# Altium PCB MICROPRESSURE.PcbDoc (part 1 of 2)
Units mm, origin at the board's own origin, x right, y up, seen from the top; angles counter-clockwise.
Board outline 57.02 x 83.19 mm, 2 copper layers (Top Layer, Bottom Layer); 104 components, 45 nets, 269 pads, 428 vias.
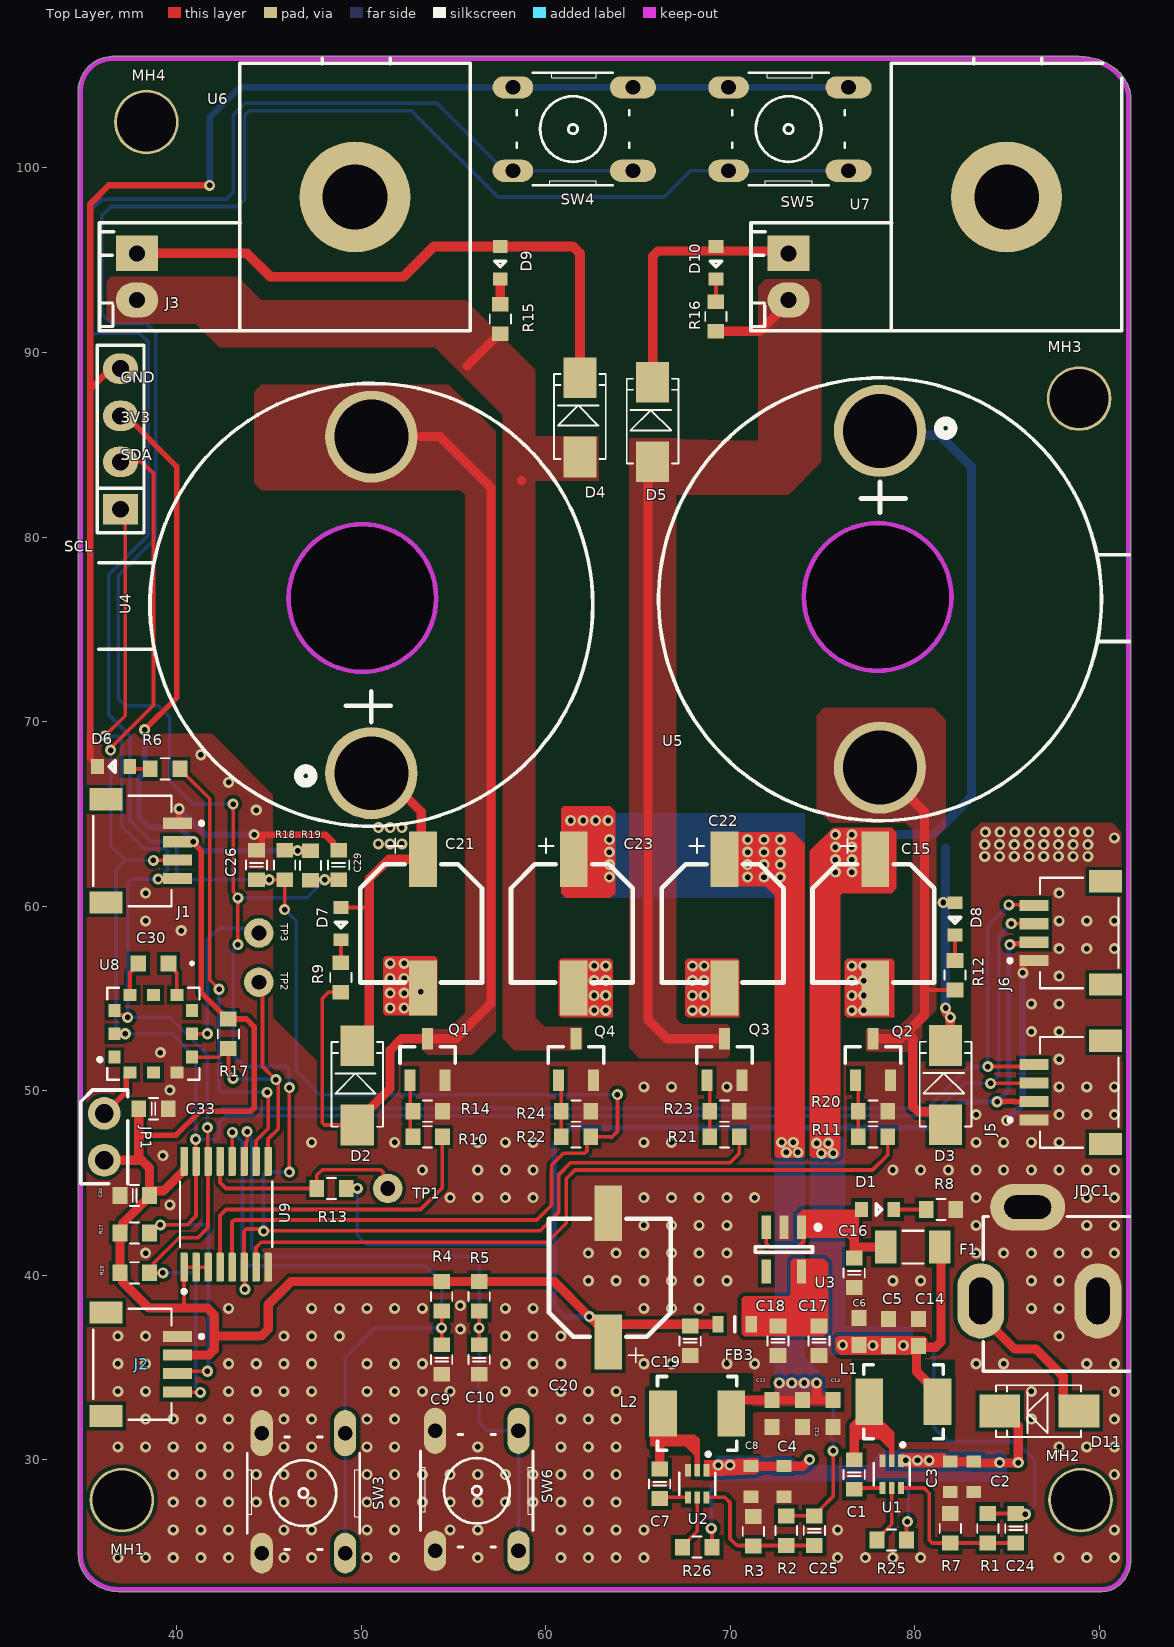
[diagram p0: Top Layer view]
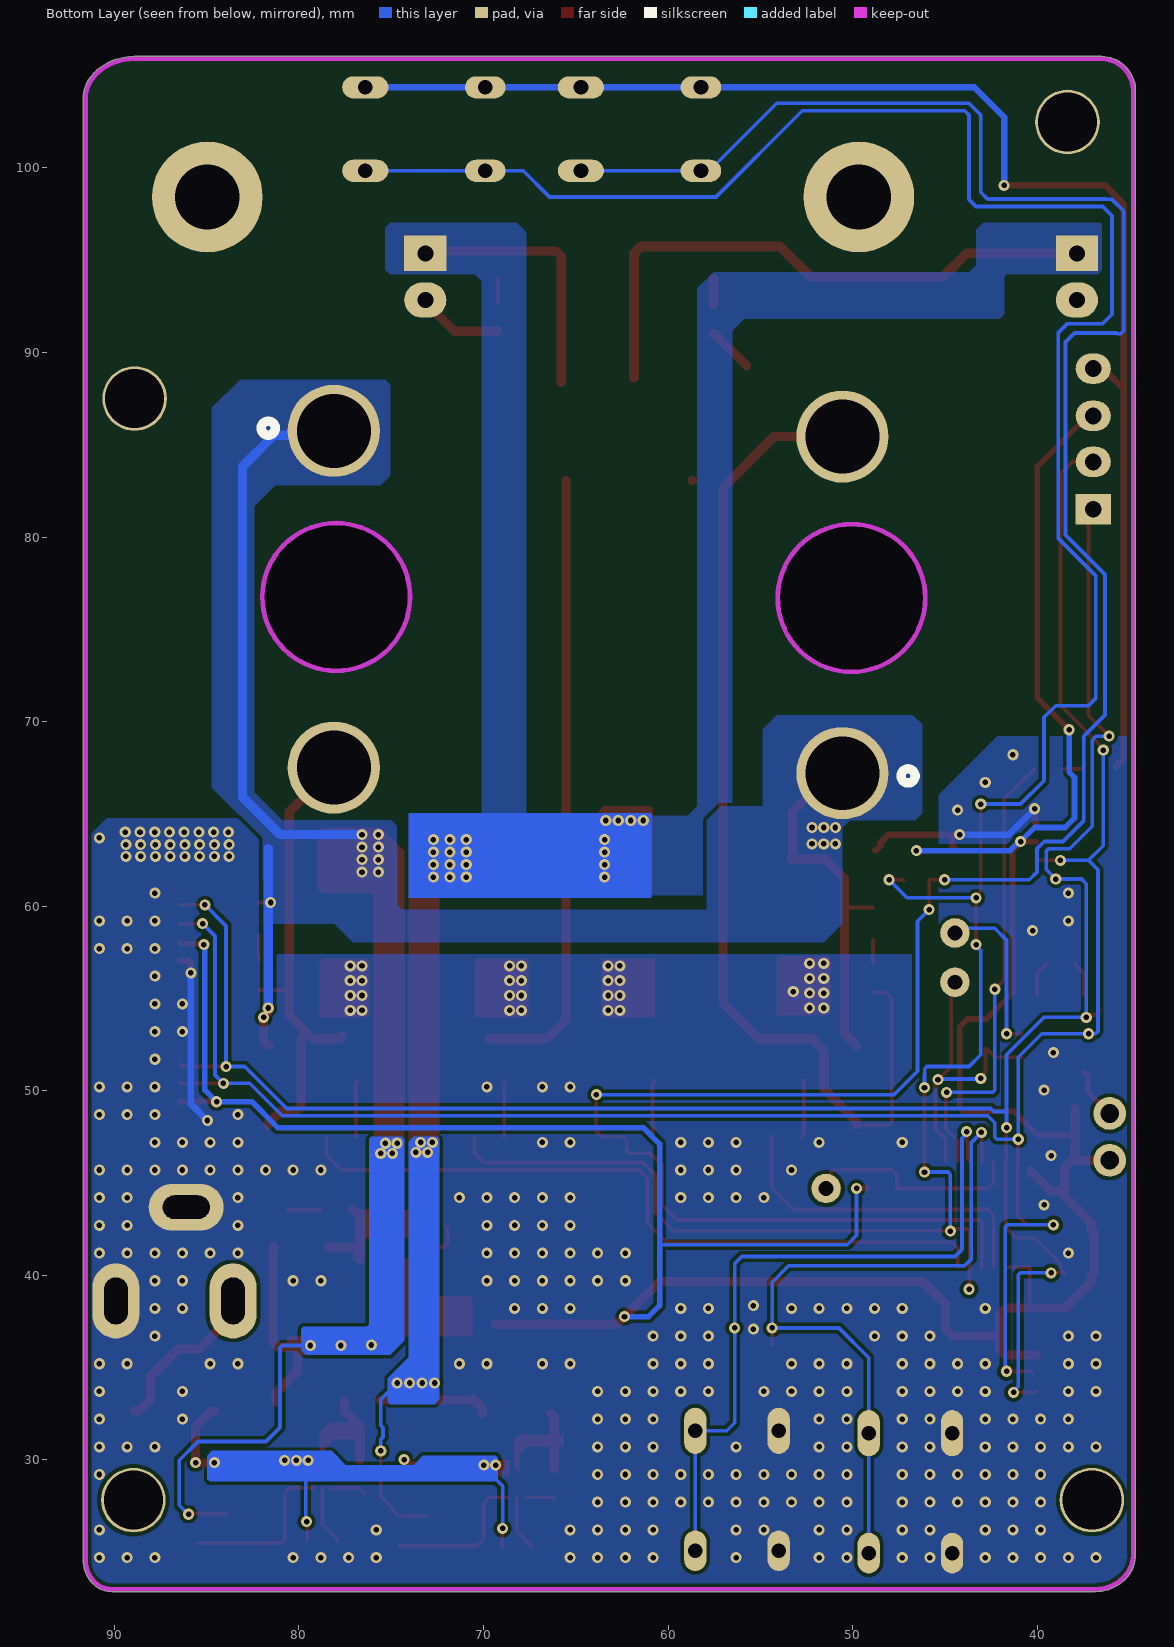
[diagram p1: Bottom Layer view, seen from below]
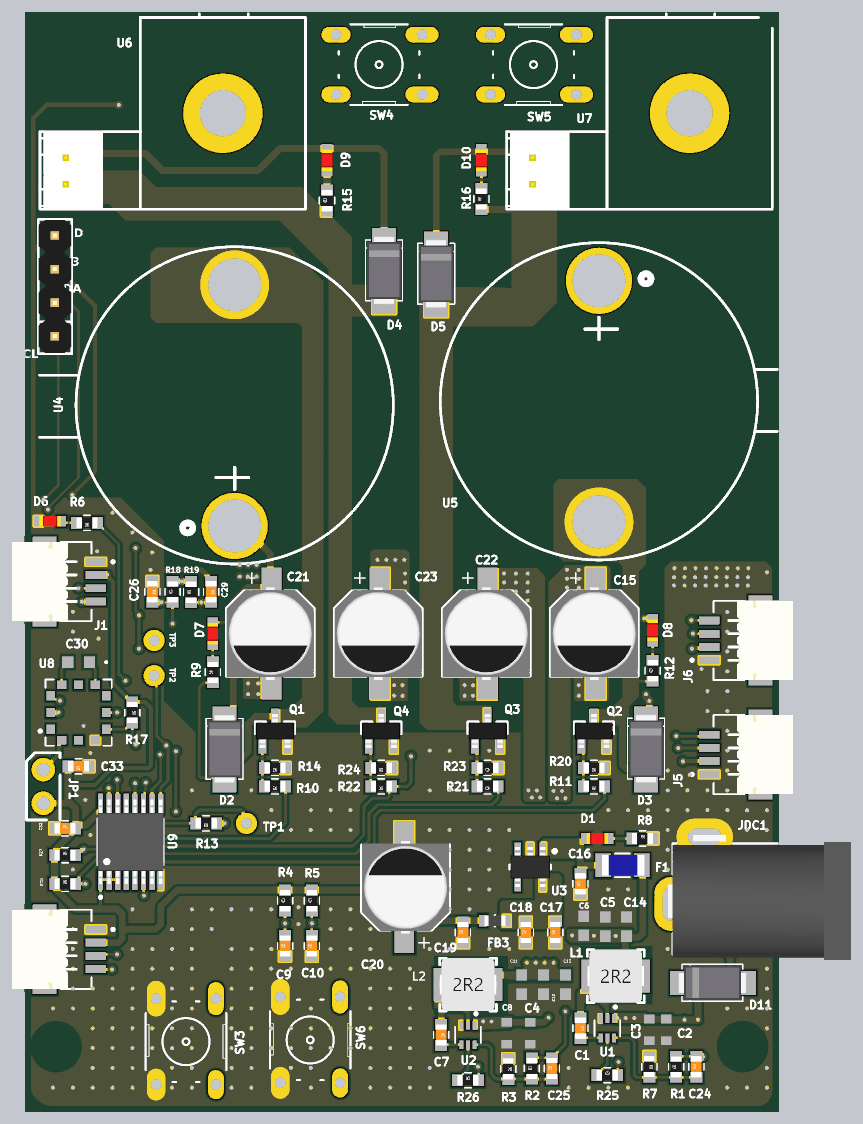
[diagram p2: 3D render of the assembled board from above, using the file's embedded part models]

## Layer stack, top to bottom
Top Solder: solder mask 0.0102, Solder Resist, Dk 3.5
Top Layer: signal copper 0.0356
Dielectric 1: dielectric 0.32, FR-4, Dk 4.8
Bottom Layer: signal copper 0.0356
Bottom Solder: solder mask 0.0102, Solder Resist, Dk 3.5

## Board outline
34.671,24.848 34.671,25.273 34.671,25.146 34.671,104.183 34.671,104.394 34.692,104.465 cw(c36.532,104.184) 35.216,105.5 cw(c36.523,104.193) 36.49,106.041 36.523,106.045 88.9,106.045 88.913,106.045 cw(c88.913,102.883) 91.149,105.119 91.186,105.037 cw(c89.833,103.759) 91.694,103.759 91.694,25.274 91.694,25.273 91.694,24.594 cw(c89.833,24.594) 91.149,23.278 cw(c90.139,24.288) 90.139,22.86 36.839,22.86 cw(c36.839,25.155) 35.216,23.532 cw(c36.532,24.848)
cut-out: 46.057,76.694 cw(c50.057,76.694) 50.057,80.694 cw(c50.057,76.694) 54.057,76.694 cw(c50.057,76.694) 50.057,72.694 cw(c50.057,76.694)
cut-out: 73.971,76.822 ccw(c77.971,76.822) 77.971,72.822 ccw(c77.971,76.822) 81.971,76.822 ccw(c77.971,76.822) 77.971,80.822 ccw(c77.971,76.822)

## Design rules (kind name [scope] priority, off if disabled: settings)
Clearance [All] p1: gap=0.2 ignorepadtopadclearanceinfootprint=TRUE
HoleSize [All] p1: absolutevalues=TRUE maxlimit=10 minlimit=0.025 maxpercent=80.000 minpercent=20.000
HoleToHoleClearance [All] p1: gap=0.2 allowstackedmicrovias=TRUE
MinimumSolderMaskSliver [All] p1: minsoldermaskwidth=0.02
PolygonConnect [All] p1: connectstyle=Direct reliefconductorwidth=0.254 reliefentries=4 polygonreliefangle="90 Angle" airgapwidth=0.254
RoutingVias [All] p1: holewidth=0.3 width=0.6 viastyle="Through Hole" minholewidth=0.3 minwidth=0.6 maxholewidth=1.5 maxwidth=3
SilkToSilkClearance [All] p1: silktosilkclearance=0.1
SilkToSolderMaskClearance [IsPad] p1: minsilkscreentomaskgap=0.08 clearancetoexposedcopper=TRUE
SolderMaskExpansion [All] p1: expansion=0.102 istentingtop=FALSE
SupplyNets "Schematic Supply Nets" [InNet('6V')] p1: voltage=0.000
SupplyNets "Schematic Supply Nets_8" [InNet('VIN')] p2: voltage=0.000
SupplyNets "Schematic Supply Nets_7" [InNet('4V5')] p3: voltage=0.000
SupplyNets "Schematic Supply Nets_6" [InNet('4V5A')] p4: voltage=0.000
SupplyNets "Schematic Supply Nets_5" [InNet('3V3')] p5: voltage=0.000
SupplyNets "Schematic Supply Nets_4" [InNet('GND')] p6: voltage=0.000
SupplyNets "Schematic Supply Nets_3" [InNet('+12')] p7: voltage=0.000
SupplyNets "Schematic Supply Nets_1" [InNet('D3V3')] p8: voltage=0.000
Width [All] p1: maxlimit=1 minlimit=0.15 preferedwidth=0.2
25 further rules are at their usual default settings.

## Classes and differential pairs
component class U_POWER: C1 C2 C3 C4 C5 C6 C7 C11 C12 C13 C14 C16 C17 C18 C19 C20 C24 C25 D1 D11 F1 FB3 JDC1 L1 L2 R1 R2 R3 R7 R8 R25 R26 U1 U2 U3
component class U_PERIPHERAL: C15 C21 C22 C23 C26 C29 D2 D3 D4 D5 D7 D8 D9 D10 Q1 Q2 Q3 Q4 R9 R10 R11 R12 R14 R15 R16 R18 R19 R20 R21 R22 R23 R24 SW4 SW5 U4 U5 U6 U7
component class U_MCU: C9 C10 C30 C32 C33 D6 J1 J2 J3 J5 J6 JP1 MH1 MH2 MH3 MH4 R4 R5 R6 R13 R17 R27 R28 SW3 SW6 TP1 TP2 TP3 U8 U9

## Components (designator, comment, footprint, x,y, rotation, side; value= is the part's Value field where it differs from the comment)
C1 "100nF" C0603 76.708,29.21 r270 top
C2 "10uF" CAP_CL10_SAM 83.185,29.083 r90 top
C3 "10uF" CAP_CL10_SAM 81.915,29.083 r90 top
C4 "10uF" CAP_CL10_SAM 72.898,28.829 r90 top
C5 "22uF" G-188_MUR 78.577,36.897 r270 top
C6 "22uF" G-188_MUR 76.962,36.957 r270 top
C7 "100nF" C0603 66.167,28.702 r270 top
C8 "10uF" CAP_CL10_SAM 71.12,28.829 r90 top
C9 "100nF" C0603 54.356,35.433 r90 top
C10 "100nF" C0603 56.388,35.433 r90 top
C11 "22uF" G-188_MUR 72.263,32.512 r90 top
C12 "22uF" G-188_MUR 73.914,32.512 r90 top
C13 "22uF" G-188_MUR 75.565,32.512 r90 top
C14 "22uF" G-188_MUR 80.191,36.897 r270 top
C15 "CAP ALUM 100UF 20% 16V SMD" "CAPACITOR SIZE_D(D6.6)" 77.851,59.055 r270 top value="100u, 16v"
C16 "10 µF" C0603 76.708,40.132 r90 top
C17 "100nF" C0603 74.803,36.449 r90 top
C18 "10 µF" C0603 72.581,36.449 r90 top
C19 "10 µF" C0603 67.818,36.449 r90 top
C20 "CAP ALUM 100UF 20% 16V SMD" "CAPACITOR SIZE_D(D6.6)" 63.373,39.878 r90 top value=100uF
C21 "CAP ALUM 100UF 20% 16V SMD" "CAPACITOR SIZE_D(D6.6)" 53.34,59.055 r270 top value="100u, 16v"
C22 "CAP ALUM 100UF 20% 16V SMD" "CAPACITOR SIZE_D(D6.6)" 69.681,59.055 r270 top value="100u, 16v"
C23 "CAP ALUM 100UF 20% 16V SMD" "CAPACITOR SIZE_D(D6.6)" 61.51,59.055 r270 top value="100u, 16v"
C24 "100nF" C0603 85.471,26.289 r90 top
C25 "100nF" C0603 74.549,26.162 r90 top
C26 "100nF" C0603 44.323,62.23 r270 top
C29 "100nF" C0603 48.768,62.23 r270 top
C30 "1nF" CAP_GCJ18_1p8X0p9X0p9_MUR 38.735,56.896 r180 top
C32 "100nF" C0603 37.719,44.323 r0 top
C33 "100nF" C0603 38.735,49.022 r180 top
D1 "LED Red" LED0603-R 77.978,43.561 r180 top value="LED PWR"
D2 "SS34" DO-214AC 49.784,50.292 r90 top
D3 "SS34" DO-214AC 81.661,50.303 r90 top
D4 "SS34" DO-214AC 61.849,86.487 r90 top
D5 "SS34" DO-214AC 65.786,86.233 r90 top
D6 "LED Red" LED0603-R 36.576,67.564 r0 top
D7 "LED Red" LED0603-R 48.895,59.055 r90 top
D8 "LED Red" LED0603-R 82.169,59.309 r90 top
D9 "LED Red" LED0603-R 57.531,94.869 r90 top
D10 "LED Red" LED0603-R 69.215,94.869 r90 top
D11 "SS34" DO-214AC 86.741,32.639 r180 top
F1 "C1F5" "FUSE C1F5" 79.883,41.529 r180 top
FB3 "330 Ohms @ 100 MHz" L0603 70.231,37.338 r180 top
J1 "PRT-14417" SPARKFUN_PRT-14417 37.592,62.992 r270 top
J2 "PRT-14417" SPARKFUN_PRT-14417 37.592,35.179 r270 top
J3 "Jumper 4" JP4 36.957,84.049 r90 top value=J3
J5 "PRT-14417" SPARKFUN_PRT-14417 88.9,49.911 r90 top
J6 "PRT-14417" SPARKFUN_PRT-14417 88.9,58.547 r90 top
JDC1 "Jac DC 5521" DC0 86.741,41.148 r180 top value="Jac DC"
JP1 "JP2" JP2-CLOSED 36.068,48.768 r0 top value="Connector 2"
L1 "4.7uH" IND-0420-2R2 79.375,33.147 r0 top
L2 "4.7uH" IND-0420-2R2 68.199,32.512 r0 top
MH1 "MOUNTING HOLE" M3 58.039,-62.35 r0 top
MH2 "MOUNTING HOLE" M3 109.982,-62.35 r0 top
MH3 "MOUNTING HOLE" M3 109.91,-2.66 r0 top
MH4 "MOUNTING HOLE" M3 59.364,12.326 r0 top
Q1 "AO3400A" SOT-23 53.594,51.689 r90 top
Q2 "AO3400A" SOT-23 77.724,51.689 r90 top
Q3 "AO3400A" SOT-23 69.681,51.689 r90 top
Q4 "AO3400A" SOT-23 61.637,51.689 r90 top
R1 "197K" R0603 83.947,26.289 r90 top
R2 "270K" R0603 73.025,26.162 r90 top
R3 "30k" R0603 71.247,26.124 r270 top
R4 "10k" R0603 54.356,38.862 r90 top
R5 "10k" R0603 56.388,38.862 r90 top
R6 "1K" R0603 39.37,67.437 r180 top
R7 "30K" R0603 81.915,26.289 r270 top
R8 "1K" R0603 81.407,43.561 r0 top value=2.2kR
R9 "RES 1K 5% 1/10W 0603" R0603 48.895,56.134 r90 top value=1K
R10 "RES 100R 5% 1/10W 0603" R0603 53.594,47.498 r180 top value=100R
R11 "RES 100R 5% 1/10W 0603" R0603 77.724,47.498 r180 top value=100R
R12 "RES 1K 5% 1/10W 0603" R0603 82.169,56.261 r90 top value=1K
R13 "2.2K" R0603 48.387,44.704 r180 top
R14 "RES 10K 5% 1/10W 0603" R0603 53.594,48.895 r180 top value=10K
R15 "RES 1K 5% 1/10W 0603" R0603 57.531,91.821 r90 top value=1K
R16 "RES 1K 5% 1/10W 0603" R0603 69.215,91.948 r90 top value=1K
R17 "10K" R0603 42.799,53.086 r270 top
R18 "10k" R0603 45.847,62.23 r90 top
R19 "10k" R0603 47.244,62.2 r90 top
R20 "RES 10K 5% 1/10W 0603" R0603 77.724,48.895 r180 top value=10K
R21 "RES 100R 5% 1/10W 0603" R0603 69.681,47.498 r180 top value=100R
R22 "RES 100R 5% 1/10W 0603" R0603 61.637,47.498 r180 top value=100R
R23 "RES 10K 5% 1/10W 0603" R0603 69.681,48.895 r180 top value=10K
R24 "RES 10K 5% 1/10W 0603" R0603 61.637,48.895 r180 top value=10K
R25 "RES 100K 5% 1/10W 0603" R0603 78.74,25.654 r0 top value=100K
R26 "RES 100K 5% 1/10W 0603" R0603 68.199,25.273 r0 top value=100K
R27 "4.7K" R0603 37.719,42.291 r0 top
R28 "4.7K" R0603 37.719,40.132 r0 top
SW3 "SW2" SWITCH 46.863,28.194 r270 top
SW4 "SW2" SWITCH 61.468,102.108 r180 top
SW5 "SW2" SWITCH 73.152,102.108 r180 top
SW6 "SW2" SWITCH 56.261,28.321 r270 top
TP1 "1" TP 51.435,44.704 r90 top
TP2 "1" TP 44.45,55.88 r90 top
TP3 "1" TP 44.45,58.547 r90 top
U1 "TI TPS563203DRLR" SOT50P160X60-6N 78.74,29.21 r270 top
U2 "TI TPS563203DRLR" SOT50P160X60-6N 68.199,28.702 r270 top
U3 "AP2112K-3.3TRG1" SOT-23-5 72.898,41.402 r270 top value=1K
U4 "PUMP" Pump 50.673,76.327 r90 top
U5 "PUMP" Pump 77.978,76.632 r270 top
U6 "PUMP" VALVE 49.657,98.425 r0 top
U7 "PUMP" VALVE 84.963,98.425 r0 top
U8 "MPRLS0025PA00001A" XDCR_MPRLS0025PA00001A 38.735,53.086 r90 top
U9 "TCA9534APWR" SOP65P640X120-16N 42.672,43.307 r90 top

## Footprints (in the part's own frame and the unit in brackets; to place one, negate y for a bottom-side part, rotate by r counter-clockwise, add the part's x,y. Pads: shape width x height; smd on the part's side, far side on the other; paste and mask are expansions set on the pad)
C0603 [mm] "Chip Capacitor; Body 1.6 x 0.8 mm (LxW typ)"
  rect 0.8x0.9 smd: 1(-0.8,0) 2(0.8,0)
  silkscreen extent -0.25,-0.58 0.25,0.58, body extent -0.8,-0.4 0.8,0.4, height 0.3
CAP_CL10_SAM [mm]
  rect 0.656x0.8 smd paste+0 mask+0: 1(-0.828,0) 2(0.828,0)
CAP_GCJ18_1p8X0p9X0p9_MUR [mil]
  rect 33.78x35 smd paste+0 mask+0: 1(-32.39,0) 2(32.39,0)
  silkscreen extent -85,-3 -79,3
"CAPACITOR SIZE_D(D6.6)" [mm]
  rect 3x1.5 smd: 1(-3.49,0) 2(3.491,0)
  silkscreen extent -4.61,-3.4 3.19,3.2, body extent -3.51,-3.4 3.49,3.2, height 5.41
DC0 [mil] "Jac DC input"
  oval 100x160 hole 50 slot 100 at 90 deg: 1(125,100) 2(-125,100)
  oval 160x100 hole 50 slot 100 at 0 deg: 3(25,-100)
  silkscreen extent -192,-80 120,250, body extent -410,-105 134,269, height 434
DO-214AC [mm] "SMA"
  rect 2.2x1.8 smd: 1(-2.148,0) 2(2.148,0)
  silkscreen extent -2.25,-1.4 2.35,1.4, body extent -2.55,-1.3 2.65,1.3, height 2.4
"FUSE C1F5" [mm]
  rect 1.17x1.8 smd: 1(-1.47,0) 2(1.47,0)
  silkscreen extent -0.56,-0.89 0.56,0.89, body extent -1.65,-0.8 1.55,0.78, height 0.8
G-188_MUR [mil]
  rect 34x32 smd paste+0 mask+0: 1(-28.5,0) 2(28.5,0)
IND-0420-2R2 [mm]
  rect 1.5x2.5 smd: 1(-1.85,0) 2(1.85,0)
  silkscreen extent -2.15,-2 2.15,2, body extent -2.15,-2 2.15,2, height 2.2
JP2-CLOSED [mil]
  round 70 hole 40: 1(0,0) 2(0,-100)
  silkscreen extent -50,-150 50,50, body extent -50,-152 50,50, height 300
JP4 [mil] "Jumper 4"
  rect 65x75 hole 36: 1(-100,0)
  oval 65x75 hole 36: 2(1,0) 3(99,0) 4(200,0)
  silkscreen extent -150,-50 250,50, body extent -148,-48 248,50, height 323
L0603 [mm] "Chip Capacitor; Body 1.6 x 0.8 mm (LxW typ)"
  rect 0.6x0.9 smd: 1(-0.9,0) 2(0.9,0)
  silkscreen extent 0,-0.4 0,0.4, body extent -0.8,-0.4 0.8,0.4, height 0.8
LED0603-R [mm]
  rect 0.7x0.8 smd: 1(0.875,0) 2(-0.875,0)
  silkscreen extent -0.22,-0.3 0.08,0.3, body extent -0.81,-0.4 0.81,0.4, height 1.1
M3 [mm]
  round 3.5 hole 3.2: 1(-21.01,90.163)
Pump [mm]
  round 5 hole 4: 1(-9.12,0.127) 2(9.12,0.127)
  silkscreen extent -12,-11.87 12,14.89
R0603 [mm]
  rect 0.8x0.9 smd: 1(-0.8,0) 2(0.8,0)
  silkscreen extent -0.25,-0.58 0.25,0.58, body extent -0.81,-0.4 0.79,0.4, height 0.3
SOP65P640X120-16N [mm]
  rrect25% 1.57x0.41 smd: 1(-2.87,2.275) 2(-2.87,1.625) 3(-2.87,0.975) 4(-2.87,0.325) 5(-2.87,-0.325) 6(-2.87,-0.975) 7(-2.87,-1.625) 8(-2.87,-2.275) 9(2.87,-2.275) 10(2.87,-1.625) 11(2.87,-0.975) 12(2.87,-0.325) 13(2.87,0.325) 14(2.87,0.975) 15(2.87,1.625) 16(2.87,2.275)
  silkscreen extent -4.29,-2.5 1.77,2.5, body extent -3.2,-2.5 3.2,2.5, height 1.2
SOT50P160X60-6N [mm]
  rect 0.66x0.31 smd: 1(-0.735,0.5) 2(-0.735,0) 3(-0.735,-0.5) 4(0.735,-0.5) 5(0.735,0) 6(0.735,0.5)
  silkscreen extent -1.7,-0.97 0.6,0.97
SOT-23 [mm] "SOT23, 3-Leads, Body 2.9x1.3mm, Pitch 0.95mm, Lead Span 2.4mm, IPC Medium Density"
  rect 1.15x0.6 smd: 1(-1.125,0.95) 2(-1.125,-0.95) 3(1.125,0)
  silkscreen extent -0.2,-1.5 0.7,1.5, body extent -1.27,-1.46 1.28,1.46, height 0.99
SOT-23-5 [mm] "SOT23, 5-Leads, Body 2.9x1.6mm, Pitch 0.95mm, Lead Span 2.8mm, IPC Low Density"
  rect 1.3x0.5 smd: 1(-1.2,0.95) 2(-1.2,0) 3(-1.2,-0.95) 4(1.2,-0.95) 5(1.2,0.95)
  silkscreen extent -1.32,-1.55 0.15,1.98, body extent -1.5,-1.5 1.5,1.5, height 1.5
SPARKFUN_PRT-14417 [mm]
  rect 0.6x1.55 smd: 1(-1.5,2.45) 2(-0.5,2.45) 3(0.5,2.45) 4(1.5,2.45)
  rect 1.2x1.8 smd: S1(-2.8,-1.425) S2(2.8,-1.425)
  silkscreen extent -3,-2.12 3,3.85, body extent -3,-3.9 3,1.05, height 3.25
SWITCH [mm]
  oval 2.5x1.2 hole 0.8: 1(-3.251,2.261) 3(-3.251,-2.261)
  oval 2.2x1.2 hole 0.8: 2(3.251,2.261) 4(3.251,-2.261)
  silkscreen extent -3.05,-3.05 3.05,3.05, body extent -4.08,-3.1 3.82,3.1, height 9.5
TP [mm] "Connect 1"
  round 1.6 hole 0.8: 1(0,0)
VALVE [mil]
  rect 90x75 hole 34: 1(-465,-120)
  oval 90x75 hole 34: 2(-465,-220)
  round 236.22 hole 137.8 unplated: 3(0,0)
  silkscreen extent -546,-285 246,296, body extent -535,-288 -358,-52, height 236
XDCR_MPRLS0025PA00001A [mm]
  rect 0.7x0.65 smd: 1(-1.27,2.1) 2(0,2.1) 3(1.27,2.1) 7(1.27,-2.1) 8(0,-2.1) 9(-1.27,-2.1)
  rect 0.65x0.7 smd: 4(2.1,1.27) 5(2.1,0) 6(2.1,-1.27) 10(-2.1,-1.27) 11(-2.1,0) 12(-2.1,1.27)
  silkscreen extent -2.5,-2.5 2.5,3

## Part data
C1 C7: library part "CAPCER0001 100nF 10% 50V X7R 0603 SMD_1", "CAP CER 100nF 10% 50V X7R 0603 SMD", CERTIFICATION=NA, CLASS=B, ComponentLink1Description=Datasheet, ComponentLink1URL=https://datasheet.lcsc.com/lcsc/1811021431_Samsung-Electro-Mechanics-CL10B104KB8NNNC_C1591.pdf, LINE=SMT, MOUNT=SMD, TMG CODE=None, TMG PN=CAPCER0001, TYPE=EP, UNIT=PCS
C2 C3 C4 C8: library part CL10A106MQ8NNNC, "Description", Manufacturer_Name=Samsung, Copyright="Copyright (C) 2026 Ultra Librarian. All rights reserved.", Manufacturer_Part_Number=CL10A106MQ8NNNC
C5 C6 C11 C12 C13 C14: library part GRM188R60J226MEA0D, "Description", Manufacturer_Name=Murata, Copyright="Copyright (C) 2026 Ultra Librarian. All rights reserved.", Manufacturer_Part_Number=GRM188R60J226MEA0D
C9 C10 C24 C25 C26 C29 C32 C33: library part "CAPCER0001 100nF 10% 50V X7R 0603 SMD", "CAP CER 100nF 10% 50V X7R 0603 SMD", CERTIFICATION=NA, CLASS=B, ComponentLink1Description=Datasheet, ComponentLink1URL=https://datasheet.lcsc.com/lcsc/1811021431_Samsung-Electro-Mechanics-CL10B104KB8NNNC_C1591.pdf, LINE=SMT, MOUNT=SMD, TMG CODE=None, TMG PN=CAPCER0001, TYPE=EP, UNIT=PCS
C15 C21 C22 C23: library part UWT1C101MCL1GB, Supplier Part Number 1=493-2177-2-ND, Supplier 1=Digi-Key
C16 C18 C19: library part GMC10X7R106K10NT, "CAP0603 X7R 10UF 10% 10V", Device Package="0603 (1608 Metric)", Manufacturer="Cal-Chip Electronics, Inc.", Operating Temperature="-55°C ~ 125°C", Supplier Part Number 1=4713-GMC10X7R106K10NTCT-ND, Temperature Coefficient=X7R, Tolerance=±10%, Voltage - Rated=10V, Applications="General Purpose", Capacitance="10 µF", ComponentLink1Description=Datasheet, ComponentLink1URL=https://88ce57.p3cdn1.secureserver.net/wp-content/uploads/2023/01/gmc_series-2.pdf, ComponentLink2Description="DigiKey Link", ComponentLink2URL=https://www.digikey.com/en/products/detail/cal-chip-electronics-inc/GMC10X7R106K10NT/18151126, lastupdated="2/9/2024 8:09:39 PM", Lifecycle Status=Active, Minimum Order=1, Mounting Type="Surface Mount, MLCC", Package / Case="0603 (1608 Metric)", Packaging=TapeAndReel, Part Number=GMC10X7R106K10NT, Part Status=Active, partid=49835, Price=0.26, Series=GMC, Size / Dimension="0.063\" L x 0.031\" W (1.60mm x 0.80mm)", Supplier 1=DigiKey, Thickness (Max)="0.039\" (1.00mm)"
C17: library part GMC10X7R106K10NT, "CAP0603 X7R 100nF 10% 10V", Capacitance="10 µF", Device Package="0603 (1608 Metric)", Manufacturer="Cal-Chip Electronics, Inc.", Operating Temperature="-55°C ~ 125°C", Supplier Part Number 1=4713-GMC10X7R106K10NTCT-ND, Temperature Coefficient=X7R, Tolerance=±10%, Voltage - Rated=10V, Applications="General Purpose", ComponentLink1Description=Datasheet, ComponentLink1URL=https://88ce57.p3cdn1.secureserver.net/wp-content/uploads/2023/01/gmc_series-2.pdf, ComponentLink2Description="DigiKey Link", ComponentLink2URL=https://www.digikey.com/en/products/detail/cal-chip-electronics-inc/GMC10X7R106K10NT/18151126, lastupdated="2/9/2024 8:09:39 PM", Lifecycle Status=Active, Minimum Order=1, Mounting Type="Surface Mount, MLCC", Package / Case="0603 (1608 Metric)", Packaging=TapeAndReel, Part Number=GMC10X7R106K10NT, Part Status=Active, partid=49835, Price=0.26, Series=GMC, Size / Dimension="0.063\" L x 0.031\" W (1.60mm x 0.80mm)", Supplier 1=DigiKey, Thickness (Max)="0.039\" (1.00mm)"
C20: library part UWT1C101MCL1GB, "CAP ALUM 100UF 20%  / 16V SMD", Supplier Part Number 1=493-2177-2-ND, Supplier 1=Digi-Key
C30: library part GCJ188R71H102KA01D, "No Description Available", Manufacturer_Name=Murata, Copyright="Copyright (C) 2026 Ultra Librarian. All rights reserved.", Manufacturer_Part_Number=GCJ188R71H102KA01D, TYPE="Ceramic Capacitors"
D1 D6 D7 D8 D9 D10: library part LTST-C190KRKT, "Lite-On LED Red 0603", Supplier Part Number 1=160-1436-1-ND, Supplier 1=Digi-Key, Supplier Part Number 2=FL1413
D2 D3 D4 D5 D11: "Schottky Diode 40V 3A SMA", Supplier Part Number 1=SS34-E3/57TGICT-ND, Supplier 1=Digi-Key
F1: "Fuse Chip Fast Acting 5A 125V SMD Solder Pad 1206 3.2 X 1.58 X 0.63mm", Case Code (Imperial)=1206, Case Code (Metric)=3216, DC Cold Resistance=20mR, Manufacturer="Bel TRP", Max Operating Temperature=125°C, Min Operating Temperature=-55°C, Supplier Part Number 1=48AC8480, Voltage Rating=125V, Voltage Rating (DC)=63V, Case/Package=1206, Category=Uncategorized, ComponentLink1Description=http://www.mouser.com/ds/2/643/C1F-594910.pdf?src-supplier=Mouser, ComponentLink1URL=http://www.mouser.com/ds/2/643/C1F-594910.pdf?src-supplier=Mouser, ComponentLink2Description=http://belfuse.com/pdfs/C1F.pdf?src-supplier=Avnet, ComponentLink2URL=http://belfuse.com/pdfs/C1F.pdf?src-supplier=Avnet, ComponentLink3Description=https://belfuse.com/resources/datasheets/circuitprotection/ds-cp-c1f-series.pdf?src-supplier=Digikey, ComponentLink3URL=https://belfuse.com/resources/datasheets/circuitprotection/ds-cp-c1f-series.pdf?src-supplier=Digikey, Contact Plating=Tin, Fuse Type="Board Mount (Cartridge Style Excluded)", Manufacturer Part Number=C1F5, MOUNT="Surface Mount", Number of Pins=2, Packaging="Cut Tape", RoHS=Yes, Series=C1F, Supplier 1=Newark, Voltage Rating (AC)=125V
FB3: library part BLM18KG331SH1D, "FERRITE BEAD 330 OHM 0603 1LN", Current Rating (Max)=1.7A, DC Resistance (DCR) (Max)=80mOhm, Device Package="0603 (1608 Metric)", Manufacturer="Murata Electronics", Operating Temperature="-55°C ~ 125°C", Ratings=AEC-Q200, Supplier Part Number 1=490-13257-1-ND, ComponentLink1Description=Datasheet, ComponentLink1URL=https://www.murata.com/en-global/products/productdata/8796737273886/QNFA9101.pdf, ComponentLink2Description="DigiKey Link", ComponentLink2URL=https://www.digikey.com/en/products/detail/murata-electronics/BLM18KG331SH1D/5881246, Filter Type="Power Line", Height (Max)="0.037\" (0.95mm)", Impedance @ Frequency="330 Ohms @ 100 MHz", lastupdated="3/11/2024 7:43:28 AM", Lifecycle Status=Active, Minimum Order=1, Mounting Type="Surface Mount", Number of Lines=1, Package / Case="0603 (1608 Metric)", Packaging=TapeAndReel, Part Number=BLM18KG331SH1D, Part Status=Active, partid=932, Price=0.02, Series="EMIFIL®, BLM18", Size / Dimension="0.063\" L x 0.032\" W (1.60mm x 0.80mm)", Supplier 1=DigiKey
J1 J2 J5 J6: "QWIIC JST CONNECTOR - SMD 4-PIN", Package=None, Check_prices=https://www.snapeda.com/parts/PRT-14417/SparkFun+Electronics/view-part/?ref=eda, MF="SparkFun Electronics", MP=PRT-14417, SnapEDA_Link=https://www.snapeda.com/parts/PRT-14417/SparkFun+Electronics/view-part/?ref=snap
J3: library part JP4, "Jumper 3"
JDC1: library part DCIN, "Jac DC input"
JP1: library part Con2, "jumper 2.0 B"
L1 L2: library part "INDMOI0016 1W2T 2.2uH 20% 5A 0420 SMD", "IND MOI 1W2T 4.7uH 20% 5A 0420 SMD", CERTIFICATION=NA, CLASS=B, ComponentLink1Description=Datasheet, ComponentLink1URL=https://datasheet.lcsc.com/lcsc/2305161117_cjiang--Changjiang-Microelectronics-Tech-FXL0420-2R2-M_C167206.pdf, LINE=SMT, MOUNT=SMD, TMG CODE=None, TYPE=EP, UNIT=PCS
MH1 MH2 MH3 MH4: library part MH
Q1 Q2 Q3 Q4: library part IRFML8244TRPBF, "MOSFET N-CH 25V 5.8A SOT23", Supplier Part Number 1=IRFML8244TRPBFCT-ND, Supplier 1=Digi-Key
R1 R2 R3 R7: library part "RESCHP0195 2K7 1% 0603 SMD", "RES CHP 2K7 1% 1/10W 0603 SMD", CERTIFICATION=NA, CLASS=B, ComponentLink1Description=Datasheet, ComponentLink1URL=https://datasheet.lcsc.com/lcsc/2304140030_YAGEO-RC0603FR-072K7L_C114612.pdf, LINE=SMT, MOUNT=SMD, TMG CODE=None, TMG PN=RESCHP0195, TYPE=EP, UNIT=PCS
R4 R5 R6 R13 R17 R18 R19 R27 R28: library part "RESCHP0428 8K4 1% 0603 SMD", "RES CHP 8K4 1% 1/10W 0603 SMD", CERTIFICATION=NA, CLASS=B, ComponentLink1Description=Datasheet, ComponentLink1URL=https://datasheet.lcsc.com/lcsc/2304140030_YAGEO-RT0603FRD07100RL_C160603.pdf, LINE=SMT, MOUNT=SMD, TMG CODE=None, TYPE=EP, UNIT=PCS
R8: library part "Resistor 2.2K", "Res Thick Film 0603 2.2K Ohm 5% 1/10W ±200ppm/°C Molded SMD SMD Paper T/R", Case Code (Imperial)=0603, Case Code (Metric)=1608, Manufacturer=Vishay, Manufacturer Part Number=CRCW06032K20JNEA, Max Operating Temperature=155°C, Max Power Dissipation=100mW, Min Operating Temperature=-55°C, Package Quantity=5000, Ratings=AEC-Q200, Resistance=2.2kR, Resistance Tolerance=5%, Resistor Type="Thick Film", Temperature Coefficient=200ppm/°C, Voltage Rating=75V, Case/Package=0603, Category="Chip SMD Resistors", ComponentLink1Description=https://datasheet.ciiva.com/2462/dcrcwe3-2462048.pdf?src-supplier=Digikey, ComponentLink1URL=https://datasheet.ciiva.com/2462/dcrcwe3-2462048.pdf?src-supplier=Digikey, ComponentLink2Description=https://datasheet.ciiva.com/16767/70201119-16767464.pdf?src-supplier=Allied+Electronics, ComponentLink2URL=https://datasheet.ciiva.com/16767/70201119-16767464.pdf?src-supplier=Allied+Electronics, ComponentLink3Description=https://datasheet.ciiva.com/2462/dcrcwe3-2462046.pdf?src-supplier=Digikey, ComponentLink3URL=https://datasheet.ciiva.com/2462/dcrcwe3-2462046.pdf?src-supplier=Digikey, ComponentLink4Description=https://datasheet.ciiva.com/5541/dcrcwe3-109170-5541959.pdf?src-supplier=Mouser, ComponentLink4URL=https://datasheet.ciiva.com/5541/dcrcwe3-109170-5541959.pdf?src-supplier=Mouser, ComponentLink5Description=https://datasheet.ciiva.com/16286/dcrcwe3-16286997.pdf?src-supplier=Future+Electronics, ComponentLink5URL=https://datasheet.ciiva.com/16286/dcrcwe3-16286997.pdf?src-supplier=Future+Electronics, Construction=Rectangular, Contact Plating=Tin, Depth=0.85mm, Features="Automotive AEC-Q200", Height=0.45mm, Lead Free=5697LeadFree, Length=1.55mm, Military Standard=Not, Number of Terminations=2, Packaging="Tape and Reel", Power Rating=100mW, Pricing 1="5000=0.0053 (USD)", Radiation Hardening=No, Reach SVHC Compliant=Unknown, RoHS=Yes, RoHS Compliant=Yes, Series=CRCW, Size Code=0603, Stock 1=130000, Supplier 1="Arrow Electronics", Supplier Part Number 1=CRCW06032K20JNEA, Termination=SMD/SMT, Tolerance=5%, Weight=7.1E-05oz, Width=0.85mm
R9 R12 R15 R16: library part RC0603JR-071KL, "Yageo RES 1K 5% 1/10W 0603", Supplier Part Number 1=C131707, Supplier 1=LCSC
R10 R11 R21 R22: library part RC0603JR-07100RL, "Yageo RES 100R 5% 1/10W 0603", Supplier Part Number 1=311-100GRCT-ND, Supplier 1=Digi-Key, Supplier Part Number 2=FL2438
R14 R20 R23 R24: library part RC0603JR-0710KL, "Yageo RES 10K 5% 1/10W 0603", Supplier Part Number 1=311-10KGRCT-ND, Supplier 1=Digi-Key, Supplier Part Number 2=FL2403
R25 R26: library part RC0603JR-07100KL, "Yageo RES 100K 5% 1/10W 0603", Supplier Part Number 1=311-100KGRCT-ND, Supplier 1=Digi-Key, Supplier Part Number 2=FL2402
SW3 SW4 SW5 SW6: "Switch button 4 pin"
TP1 TP2 TP3: library part TP, "CONNECT 1"
U1 U2: library part "ICSOCV0021 BCK TPS563201 3A SOT23-6 SMD", "ICS OCV BCK TPS563201 3A SOT23-6 SMD", CERTIFICATION=NA, CLASS=B, ComponentLink1Description=Datasheet, ComponentLink1URL=https://datasheet.lcsc.com/lcsc/2304241919_Texas-Instruments-TPS563201DDCR_C116592.pdf, LINE=SMT, MOUNT=SMD, TMG CODE=None, TYPE=EP, UNIT=PCS
U3: "AP2112 Series 0.6 A 3.3 V Fixed Output SMT LDO Linear Regulator - SOT23-5", Package="SOT-753 Diodes Inc.", Availability=Unavailable, MF="Diodes Inc.", MP=AP2112K-3.3TRG1, Price=None, SnapEDA_Link=https://www.snapeda.com/parts/AP2112K-3.3TRG1/Diodes%20Inc./view-part/?ref=snap
U4 U5 U6 U7: library part A5F083, "Connector Header 2 Position 6.35mm Solder Straight Thru-Hole 2 Terminal 1 Port MLX-Series", Color=Natural, Contact Resistance=3.5mΩ, Current Rating=13.5A, Dielectric Material=Polyester, Flammability Rating="UL94 V-2", Insulation Resistance=1GΩ, Manufacturer=Molex, Manufacturer Lifecycle Status=ACTIVE, Manufacturer Part Number=10-84-4022, Max Operating Temperature=105°C, Min Operating Temperature=-55°C, Operating Force=6.672N, Supplier Part Number 1=0010844022, Voltage Rating=600V, Category="Headers and Wire Housings", China RoHS=Compliant, ComponentLink1Description=https://datasheet.octopart.com:443/10-84-4022-Molex-datasheet-137053637.pdf?src-supplier=element14+APAC, ComponentLink1URL=https://datasheet.octopart.com:443/10-84-4022-Molex-datasheet-137053637.pdf?src-supplier=element14+APAC, ComponentLink2Description=https://datasheet.octopart.com:443/10-84-4022-Molex-datasheet-13791970.pdf?src-supplier=Molex, ComponentLink2URL=https://datasheet.octopart.com:443/10-84-4022-Molex-datasheet-13791970.pdf?src-supplier=Molex, ComponentLink3Description=https://sigma.octopart.com:443/16272272/technical_drawing/Molex-10-84-4022.pdf?src-supplier=Molex, ComponentLink3URL=https://sigma.octopart.com:443/16272272/technical_drawing/Molex-10-84-4022.pdf?src-supplier=Molex, ComponentLink4Description=https://datasheet.octopart.com:443/010844022-Molex-datasheet-5390850.pdf?src-supplier=Molex, ComponentLink4URL=https://datasheet.octopart.com:443/010844022-Molex-datasheet-5390850.pdf?src-supplier=Molex, ComponentLink5Description=https://datasheet.octopart.com:443/10-84-4022-Molex-datasheet-154742841.pdf?src-supplier=Master+Electronics, ComponentLink5URL=https://datasheet.octopart.com:443/10-84-4022-Molex-datasheet-154742841.pdf?src-supplier=Master+Electronics, ComponentLink6Description=https://datasheet.octopart.com:443/10-84-4022-Molex-datasheet-33343972.pdf?src-supplier=Electro+Sonic, ComponentLink6URL=https://datasheet.octopart.com:443/10-84-4022-Molex-datasheet-33343972.pdf?src-supplier=Electro+Sonic, ComponentLink7Description=https://datasheet.octopart.com:443/10-84-4022-Molex-datasheet-21205596.pdf?src-supplier=Electro+Sonic, ComponentLink7URL=https://datasheet.octopart.com:443/10-84-4022-Molex-datasheet-21205596.pdf?src-supplier=Electro+Sonic, ComponentLink8Description=https://datasheet.octopart.com:443/10-84-4022-Molex-datasheet-62102692.pdf?src-supplier=Electro+Sonic, ComponentLink8URL=https://datasheet.octopart.com:443/10-84-4022-Molex-datasheet-62102692.pdf?src-supplier=Electro+Sonic, ComponentLink9Description=https://datasheet.octopart.com:443/10-84-4022-Molex-datasheet-140174504.pdf?src-supplier=RS+(Formerly+Allied+Electronics), ComponentLink9URL=https://datasheet.octopart.com:443/10-84-4022-Molex-datasheet-140174504.pdf?src-supplier=RS+(Formerly+Allied+Electronics), ComponentLink10Description=https://datasheet.octopart.com:443/10-84-4022-Molex-datasheet-120134962.pdf?src-supplier=RS+(Formerly+Allied+Electronics), ComponentLink10URL=https://datasheet.octopart.com:443/10-84-4022-Molex-datasheet-120134962.pdf?src-supplier=RS+(Formerly+Allied+Electronics), ComponentLink11Description=https://datasheet.octopart.com:443/10-84-4022-Molex-datasheet-32867450.pdf?src-supplier=Newark, ComponentLink11URL=https://datasheet.octopart.com:443/10-84-4022-Molex-datasheet-32867450.pdf?src-supplier=Newark, ComponentLink12Description=https://datasheet.octopart.com:443/10844022-Molex-datasheet-8320017.pdf?src-supplier=Jameco, ComponentLink12URL=https://datasheet.octopart.com:443/10844022-Molex-datasheet-8320017.pdf?src-supplier=Jameco, ComponentLink13Description=https://datasheet.octopart.com:443/10-84-4022-Molex-datasheet-5314522.pdf?src-supplier=Verical, ComponentLink13URL=https://datasheet.octopart.com:443/10-84-4022-Molex-datasheet-5314522.pdf?src-supplier=Verical, ComponentLink14Description=https://datasheet.octopart.com:443/10-84-4022-Molex-datasheet-27226.pdf?src-supplier=DigiKey, ComponentLink14URL=https://datasheet.octopart.com:443/10-84-4022-Molex-datasheet-27226.pdf?src-supplier=DigiKey, ComponentLink15Description=http://sigma.octopart.com:80/16272275/rohs_statement/Molex-10-84-4022.pdf?src-supplier=Compliance+Statements, ComponentLink15URL=http://sigma.octopart.com:80/16272275/rohs_statement/Molex-10-84-4022.pdf?src-supplier=Compliance+Statements, ComponentLink16Description=http://sigma.octopart.com:80/reach_statement/Molex-company-74.pdf?src-supplier=Compliance+Statements, ComponentLink16URL=http://sigma.octopart.com:80/reach_statement/Molex-company-74.pdf?src-supplier=Compliance+Statements, ComponentLink17Description=http://sigma.octopart.com:80/rohs_statement/Molex-company-73.pdf?src-supplier=Compliance+Statements, ComponentLink17URL=http://sigma.octopart.com:80/rohs_statement/Molex-company-73.pdf?src-supplier=Compliance+Statements, ComponentLink18Description=http://sigma.octopart.com:80/conflict_mineral_statement/Molex-company-72.pdf?src-supplier=Compliance+Statements, ComponentLink18URL=http://sigma.octopart.com:80/conflict_mineral_statement/Molex-company-72.pdf?src-supplier=Compliance+Statements, Connector Type=Power, Contact Gender=Female, Contact Material=Bronze, Contact Plating=Tin, Country of Origin=US, Gender=Female, Glow Wire Compliant=Non-compliant, Halogen Free="Low Halogen", Housing Material=Nylon, Lead Free="Lead Free", Lifecycle Status=Production, MOUNT="Through Hole", Number of Circuits=2, Number of Contacts=2, Number of Pins=2, Number of Positions=2, Number of Rows=1, Orientation=Vertical, Packaging=Carton, Pitch=6.35mm, Plating=Tin, Plating Thickness=3.5052µm, Pricing 1="1=0,2907, 10=0,267, 100=0,245, 500=0,229, 1836=0,216 (USD)", Radiation Hardening=No, REACH SVHC=Yes, RoHS=Compliant, Schedule B="8536694040, 8536694040|8536694040|8536694040|8536694040|8536694040", Shell Material=POLYAMIDE66, Stock 1=4724, Supplier 1="Arrow Electronics", Terminal Pitch=6.35mm, Termination=Solder
U8: "Pressure Sensor 25PSI _172.37kPa_ Absolute Male - 0.1 _2.5mm_ Tube 24 b 12-SMD Module", Package="SMD-10 Honeywell", Digi-Key_Part_Number=480-7098-1-ND, MF="Honeywell Sensing", MP=MPRLS0025PA00001A, SnapEDA_Link=https://www.snapeda.com/parts/MPRLS0025PA00001A/Honeywell%20Sensing%20and%20Productivity%20Solutions/view-part/2772767/?ref=snap
U9: "8-bit 1.65- to 5.5-V I2C/SMBus I/O expander with interrupt, & config registers", Package="TSSOP-16 Texas Instruments", Check_prices=https://www.snapeda.com/parts/TCA9534APWR/Texas+Instruments/view-part/?ref=eda, MF="Texas Instruments", MP=TCA9534APWR, SnapEDA_Link=https://www.snapeda.com/parts/TCA9534APWR/Texas+Instruments/view-part/?ref=snap

## Via types
v1: diameter 0.6, hole 0.3, Top Layer to Bottom Layer, tented both sides, 428 vias

## Nets (pads, with @x,y where several pads share a name; then routed paths per layer and width w, separated by ;. In a path a pad name is that pad's centre, name@x,y a point inside that pad or via, vN(x,y) a via of type N, cw(c..) or ccw(c..) an arc to the next point about the centre after c; other vN are vias at no path point)
3V3: C17.2 C18.2 FB3.1 U3.5
4V5: C5.2 C6.2 C14.2 C15.1 C21.1 C24.2 D2.2 D3.2 D7.1 D8.1 F1.1 L1.2 R1.2 U4.1 U5.1 | length 128.4
  Top Layer w0.2: D7.1 50.546,59.93 ; v1(81.534,60.198) 82.155,60.198 D8.1 ; R1.2 85.941,27.089 v1(85.979,27.051)
  Top Layer w0.5: U4.1@49.53,67.207 U4.1@50.388,66.349 ; D2.2 50.434,53.09 50.434,61.483 51.496,62.545 C21.1 53.25,62.635 53.25,65.114 51.157,67.207 U4.1 ; v1@75.311,46.863 74.93,47.244 74.93,61.722 75.753,62.545 C15.1 ; C6.2@76.962,36.223 76.987,36.223 77.047,36.163 C14.2@80.166,36.163 ; C14.2@80.082,36.079 80.082,34.79 81.225,33.647 L1.2 ; C14.2@80.191,36.097 81.114,36.097 81.407,36.39 81.407,41.475 F1.1 ; D3.2 81.915,52.705 81.915,54.002 81.68,54.237 81.68,54.464 v1(81.661,54.483)
  Bottom Layer w0.2: v1@77.844,36.195 80.909,36.195 81.026,36.078 81.026,31.75 81.788,30.988 85.471,30.988 86.487,29.972 86.487,27.533 86.005,27.051 v1(85.979,27.051) ; v1(81.534,60.198) 81.661,60.325 81.62,60.325 81.562,60.383 81.562,60.798 81.661,60.896
  Bottom Layer w0.5: v1@75.311,46.863 75.311,36.576 75.692,36.195 v1@77.844,36.195 ; v1(76.581,63.881) 81.026,63.881 83.058,65.913 83.058,83.82 81.355,85.523 78.334,85.523 U5.1 ; v1(81.661,54.483) 81.661,60.325 81.661,60.896 81.661,63.119
  other v1: 77.724,36.195 79.375,36.195 76.076,36.222 74.93,46.609 75.565,46.609 74.676,47.152 75.311,47.152 81.915,53.975 75.692,61.849 76.581,61.849 75.692,62.526 76.581,62.526 75.692,63.204 76.581,63.204 50.927,63.373 51.562,63.373 52.197,63.373 75.692,63.881 50.927,64.262 51.562,64.262 52.197,64.262
4V5A: C16.2 D1.1 F1.2 U3.1 U3.3 | length 8.6
  Top Layer w0.2: U3.3 71.948,41.717 72.136,41.529 73.66,41.529 73.96,41.829 73.96,42.414 73.998,42.452 U3.1
  Top Layer w0.5: C16.2@76.708,40.848 C16.2@76.858,40.998 ; C16.2@76.708,41.021 76.708,41.529 ; D1.1 76.708,43.166 76.708,41.529 ; F1.2 76.708,41.529
6V: C11.2 C12.2 C13.2 C22.1 C23.1 C25.2 D4.2 D5.2 D9.1 D10.1 L2.2 R2.2 U6.1 U7.1 | length 96.1
  Top Layer w0.2: R2.2 C25.2@74.333,26.962 ; C25.2 74.599,26.962 74.899,27.262 74.899,27.348 75.565,28.014 v1(75.565,30.48)
  Top Layer w0.5: D5.2 65.786,95.211 66.079,95.504 69.215,95.504 73.025,95.504 U7.1 ; C22.1 69.681,62.095 70.181,61.595 72.715,61.595 73.109,61.2 73.348,61.2 73.498,61.05 73.498,54.143 73.406,54.051 v1(73.406,47.198) v1@73.406,47.117 ; L2.2 L2.2@70.049,32.736 ; L2.2@70.549,33.312 70.049,32.812 L2.2@70.049,32.736 ; 74.676,33.312 v1(74.676,34.163) ; C13.2 C12.2 C11.2 70.549,33.236 L2.2@70.049,32.736
  Top Layer w0.53: U6.1@37.338,95.377 U6.1 43.815,95.377 45.085,94.107 52.289,94.107 53.926,95.744 D9.1 61.482,95.744 61.849,95.377 D4.2
  Bottom Layer w0.2: v1(74.676,34.163) 75.565,33.274 75.565,31.868 75.438,31.741 75.438,31.228 75.565,31.101 v1(75.565,30.48)
  Bottom Layer w0.5: v1@73.406,47.117 73.406,47.09 73.533,46.963 73.533,35.306 v1(74.676,34.163)
  other v1: 72.647,34.163 73.323,34.163 74,34.163 73.025,46.655 73.66,46.655 72.771,47.198 63.439,61.573 70.932,61.573 71.821,61.573 72.71,61.573 63.439,62.25 70.932,62.25 71.821,62.25 72.71,62.25 63.439,62.928 70.932,62.928 71.821,62.928 72.71,62.928 63.439,63.605 70.932,63.605 71.821,63.605 72.71,63.605 61.341,64.643 62.018,64.643 62.696,64.643 63.373,64.643
+12: D11.1 JDC1.1 | length 9
  Top Layer w0.5: JDC1.1 83.566,37.846 85.412,36 86.555,36 88.039,34.516 88.039,33.289 88.689,32.639 D11.1
D3V3: C19.2 C20.1 C32.2 C33.2 FB3.2 J1.2 J2.2 J3.3 J5.2 J6.2 JP1.2 R4.2 R5.2 R13.1 R17.1 R18.2 R19.2 R27.1 R28.1 U9.1 U9.2 U9.3 U9.16 | length 177.8
  Top Layer w0.2: 40.195,38.227 40.397,38.429 U9.1 U9.2 U9.3
  Top Layer w0.3: J3.3@37.084,86.614 37.211,86.614 39.989,83.836 39.989,71.287 v1(38.263,69.56) ; 37.935,47.707 38.052,47.59 39.97,47.59 41.275,48.895 44.023,48.895 44.199,49.071 44.199,53.464 43.777,53.886 R17.1 42.749,53.886 41.333,55.302 41.333,62.98 40.894,63.419 v1(40.894,63.5) 40.89,63.496 40.046,63.496 J1.2 ; R13.1 v1(49.784,44.704) ; 49.992,39.708 50.038,39.662 ; v1(84.455,49.403) 84.463,49.411 84.814,49.411 84.821,49.418 85.359,49.418 85.366,49.411 J5.2 ; v1(85.147,57.912) 85.204,57.969 86.372,57.969 J6.2
  Top Layer w0.5: JP1.2 38.099,46.228 ; C33.2 37.935,47.707 37.935,46.392 38.099,46.228 ; J2.2@40.036,35.687 41.744,35.687 42.037,35.98 42.037,36.703 ; U9.16@40.352,45.642 39.289,44.579 C32.2@38.519,44.579 ; FB3.2@69.357,37.34 67.818,37.34 62.776,37.34 v1(62.357,37.759) 60.454,39.662 R5.2 R4.2 50.038,39.662 46.203,39.662 44.958,38.417 44.958,37.084 44.577,36.703 42.037,36.703 ; 38.099,46.228 38.519,45.808 C32.2@38.519,44.579 ; C32.2@38.519,44.579 C32.2 38.519,44.273 37.069,42.823 37.069,42.441 R27.1 R28.1 37.069,39.982 37.069,39.639 38.481,38.227 40.195,38.227 41.656,38.227 42.037,37.846 42.037,36.703
  Bottom Layer w0.2: v1(49.784,44.704) 49.784,42.164 50.292,41.656 60.452,41.656
  Bottom Layer w0.3: v1(38.263,69.56) 38.263,67.27 37.973,66.98 37.973,64.771 38.482,64.262 40.132,64.262 v1(40.894,63.5) 40.975,63.5 41.46,63.015 v1(46.545,63.015) ; v1(62.357,37.759) 61.047,37.759 60.452,38.354 60.452,41.656 60.452,47.117 61.341,48.006 81.153,48.006 82.55,49.403 v1(84.455,49.403) 85.09,50.038 85.09,57.855 v1(85.147,57.912)
GND: C2.1 C3.1 C4.1 C5.1 C6.1 C8.1 C9.1 C10.1 C11.1 C12.1 C13.1 C14.1 C15.2 C16.1 C17.1 C18.1 C19.1 C20.2 C21.2 C22.2 C23.2 C26.1 C29.1 C32.1 C33.1 D6.2 J1.1 J2.1 J3.4 J5.1 J6.1 JDC1.2 JDC1.3 Q1.2 Q2.2 Q3.2 Q4.2 R3.1 R7.1 R8.2 R14.1 R20.1 R23.1 R24.1 SW3.3 SW3.4 SW4.3 SW4.4 SW5.3 SW5.4 SW6.3 SW6.4 U1.3 U2.3 U3.2 U8.10 U9.8 | length 99.7
  Top Layer w0.35: D6.2 35.701,67.614 35.526,67.789 35.511,67.789 35.306,67.994 35.306,88.011 ; J3.4 36.424,89.129 35.306,88.011 ; J1.1 40.132,64.582 v1(40.132,65.278) ; v1(41.783,99.06) 36.322,99.06 35.306,98.044 35.306,88.011 ; v1(44.196,63.881) 44.655,63.881 ; C26.1 44.373,63.03 44.598,63.255 44.598,63.824 44.655,63.881 ; C29.1 48.718,63.03 48.493,63.255 48.493,63.422 48.034,63.881 44.655,63.881 ; v1(85.852,56.388) 85.85,56.39 85.85,56.922 85.975,57.047 J6.1
  Bottom Layer w0.35: v1(40.132,65.278) 41.529,63.881 v1(44.196,63.881) ; v1(41.783,99.06) 41.783,102.743 43.409,104.369 SW4.4 SW4.3 SW5.4 SW5.3 ; v1(84.963,48.387) 85.852,49.276 85.852,54.705 v1(85.852,56.388)
  other v1: 36.809,24.705 38.309,24.705 39.809,24.705 41.309,24.705 42.809,24.705 45.809,24.705 47.309,24.705 50.309,24.705 51.809,24.705 56.309,24.705 60.809,24.705 62.309,24.705 63.809,24.705 65.309,24.705 75.809,24.705 77.309,24.705 78.809,24.705 80.309,24.705 87.809,24.705 89.309,24.705 90.809,24.705 39.809,26.205 41.309,26.205 42.809,26.205 45.809,26.205 47.309,26.205 50.309,26.205 51.809,26.205 54.809,26.205 56.309,26.205 60.809,26.205 62.309,26.205 63.809,26.205 65.309,26.205 75.809,26.205 90.809,26.205 39.809,27.705 41.309,27.705 42.809,27.705 44.309,27.705 45.809,27.705 47.309,27.705 50.309,27.705 51.809,27.705 53.309,27.705 54.809,27.705 56.309,27.705 57.809,27.705 59.309,27.705 60.809,27.705 62.309,27.705 63.809,27.705 39.809,29.205 41.309,29.205 42.809,29.205 44.309,29.205 45.809,29.205 47.309,29.205 50.309,29.205 51.809,29.205 53.309,29.205 54.809,29.205 56.309,29.205 57.809,29.205 59.309,29.205 60.809,29.205 62.309,29.205 63.809,29.205 90.809,29.205 36.809,30.705 38.309,30.705 39.809,30.705 41.309,30.705 42.809,30.705 45.809,30.705 47.309,30.705 50.309,30.705 51.809,30.705 56.309,30.705 60.809,30.705 62.309,30.705 63.809,30.705 87.809,30.705 89.309,30.705 90.809,30.705 38.309,32.205 39.809,32.205 41.309,32.205 42.809,32.205 45.809,32.205 47.309,32.205 50.309,32.205 51.809,32.205 60.809,32.205 62.309,32.205 63.809,32.205 86.309,32.205 90.809,32.205 36.809,33.705 38.309,33.705 42.809,33.705 44.309,33.705 45.809,33.705 47.309,33.705 50.309,33.705 51.809,33.705 53.309,33.705 54.809,33.705 57.809,33.705 59.309,33.705 60.809,33.705 62.309,33.705 63.809,33.705 86.309,33.705 90.809,33.705 36.809,35.205 38.309,35.205 42.809,35.205 44.309,35.205 45.809,35.205 47.309,35.205 50.309,35.205 51.809,35.205 53.309,35.205 57.809,35.205 59.309,35.205 60.809,35.205 65.309,35.205 66.809,35.205 69.809,35.205 71.309,35.205 83.309,35.205 84.809,35.205 89.309,35.205 90.809,35.205 36.809,36.705 38.309,36.705 45.809,36.705 47.309,36.705 48.809,36.705 57.809,36.705 59.309,36.705 60.809,36.705 87.809,36.705 55.372,37.084 42.809,38.205 47.309,38.205 48.809,38.205 50.309,38.205 51.809,38.205 53.309,38.205 57.809,38.205 59.309,38.205 65.309,38.205 66.809,38.205 68.309,38.205 86.309,38.205 87.809,38.205 55.372,38.354 62.309,39.705 63.809,39.705 65.309,39.705 66.809,39.705 68.309,39.705 69.809,39.705 78.809,39.705 80.309,39.705 86.309,39.705 87.809,39.705 38.309,41.205 62.309,41.205 63.809,41.205 65.309,41.205 66.809,41.205 68.309,41.205 69.809,41.205 83.309,41.205 84.809,41.205 86.309,41.205 87.809,41.205 89.309,41.205 90.809,41.205 65.309,42.705 66.809,42.705 68.309,42.705 69.809,42.705 83.309,42.705 89.309,42.705 90.809,42.705 39.624,43.815 54.809,44.205 56.309,44.205 57.809,44.205 59.309,44.205 65.309,44.205 66.809,44.205 68.309,44.205 69.809,44.205 71.309,44.205 83.309,44.205 89.309,44.205 90.809,44.205 53.309,45.705 56.309,45.705 57.809,45.705 59.309,45.705 78.809,45.705 80.309,45.705 81.809,45.705 83.309,45.705 84.809,45.705 86.309,45.705 87.809,45.705 89.309,45.705 90.809,45.705 39.243,46.482 47.309,47.205 51.809,47.205 56.309,47.205 57.809,47.205 59.309,47.205 65.309,47.205 66.809,47.205 83.309,47.205 84.809,47.205 86.309,47.205 87.809,47.205 83.309,48.705 87.809,48.705 89.309,48.705 90.809,48.705 39.624,50.038 65.309,50.205 66.809,50.205 69.809,50.205 87.809,50.205 89.309,50.205 90.809,50.205 87.809,51.705 39.116,52.07 86.309,53.205 87.809,53.205 62.611,54.356 63.246,54.356 67.945,54.356 68.58,54.356 76.581,54.356 77.216,54.356 51.562,54.483 52.324,54.483 86.309,54.705 87.809,54.705 62.611,55.16 63.246,55.16 67.945,55.16 68.58,55.16 76.581,55.16 77.216,55.16 51.562,55.287 52.324,55.287 53.213,55.372 62.611,55.965 63.246,55.965 67.945,55.965 68.58,55.965 76.581,55.965 77.216,55.965 51.562,56.092 52.324,56.092 87.809,56.205 62.611,56.769 63.246,56.769 67.945,56.769 68.58,56.769 76.581,56.769 77.216,56.769 51.562,56.896 52.324,56.896 87.809,57.705 89.309,57.705 90.809,57.705 40.244,58.674 38.309,59.205 87.809,59.205 89.309,59.205 90.809,59.205 38.309,60.705 87.809,60.705 83.784,62.697 84.582,62.697 85.38,62.697 86.179,62.697 86.977,62.697 87.775,62.697 88.573,62.697 89.372,62.697 83.784,63.332 84.582,63.332 85.38,63.332 86.179,63.332 86.977,63.332 87.775,63.332 88.573,63.332 89.372,63.332 90.809,63.705 83.82,64.008 84.618,64.008 85.417,64.008 86.215,64.008 87.013,64.008 87.811,64.008 88.61,64.008 89.408,64.008 44.309,65.205 42.809,66.705 41.309,68.205
LED: R6.1 U9.10 | length 25
  Top Layer w0.2: R6.1 40.17,67.387 40.47,67.087 40.52,67.087 41.783,65.824 41.783,56.007 v1(42.291,55.499) ; U9.10 44.297,47.294 44.958,47.955 44.958,49.853 v1(44.901,49.91)
  Bottom Layer w0.2: v1(42.291,55.499) 42.291,50.028 42.408,49.911 v1@44.9,49.911
NetC1_1: C1.1 L1.1 U1.2 | length 3.5
  Top Layer w0.5: C1.1 76.708,31.83 77.525,32.647 L1.1
NetC1_2: C1.2 U1.4 | length 1.9
  Top Layer w0.2: C1.2@76.462,28.164 C1.2 76.773,28.475 U1.4
NetC7_1: C7.1 L2.1 U2.2 | length 3.1
  Top Layer w0.5: C7.1 66.167,32.33 L2.1
NetC7_2: C7.2 U2.4 | length 1.6
  Top Layer w0.2: C7.2 66.232,27.967 U2.4
NetC24_1: C24.1 R1.1 R7.2 U1.6 | length 9
  Top Layer w0.2: U1.6 80.491,28.475 80.772,28.194 80.772,25.654 80.937,25.489 R7.2 R1.1 C24.1
NetC25_1: C25.1 R2.1 R3.2 U2.6 | length 8.1
  Top Layer w0.2: U2.6 69.696,27.967 69.977,27.686 69.977,25.728 70.305,25.4 70.358,25.4 70.396,25.362 R2.1 C25.1
NetC26_2: C26.2 R18.1 R22.1 SW4.1 SW4.2 U9.5 | length 141
  Top Layer w0.2: U9.5 42.997,42.88 43.114,42.997 59.507,42.997 60.306,43.796 60.306,45.632 60.325,45.651 60.325,45.974 60.96,46.609 62.103,46.609 62.23,46.736 62.23,47.291 R22.1 63.5,47.498 63.544,47.454 63.881,47.791 v1(63.881,49.784) ; v1(45.008,61.43) R18.1 v1(45.847,59.817)
  Bottom Layer w0.2: v1(45.008,61.43) 40.424,61.43 40.005,61.849 40.005,63.119 39.617,63.507 38.601,63.507 37.465,64.643 37.465,69.215 36.322,70.358 36.322,77.978 38.462,80.118 38.462,90.57 37.973,91.059 35.687,91.059 35.643,91.015 35.477,91.015 35.306,91.186 35.306,97.663 35.941,98.298 36.264,98.298 36.283,98.317 42.691,98.317 43.053,98.679 43.053,102.87 43.688,103.505 54.102,103.505 57.76,99.847 SW4.2 SW4.1 ; v1(45.847,59.817) 46.482,59.182 46.482,51.054 47.752,49.784 v1(63.881,49.784)
NetC29_2: C29.2 R19.1 R21.1 SW5.1 SW5.2 U9.6 | length 155
  Top Layer w0.2: v1(43.053,65.532) 43.053,60.814 43.307,60.56 v1(43.307,60.452) v1(43.307,57.912) ; v1(43.688,39.243) 43.667,39.264 43.667,40.417 U9.6 43.647,42.387 43.764,42.504 44.387,42.504 44.396,42.495 v1@44.695,42.495 ; v1(44.704,42.397) 44.725,42.418 59.69,42.418 60.706,43.434 60.706,45.466 61.341,46.101 69.977,46.101 70.481,46.605 R21.1 ; v1(46.101,45.593) v1(46.101,50.165) ; R19.1 47.274,61.43 v1(48.021,61.43)
  Bottom Layer w0.2: v1(43.053,65.532) 40.894,65.532 39.624,66.802 39.624,70.231 38.989,70.866 37.211,70.866 36.83,71.247 36.83,77.92 38.862,79.952 38.862,91.059 38.354,91.567 36.449,91.567 35.941,92.075 35.941,97.409 36.449,97.917 43.307,97.917 43.688,98.298 43.688,102.87 43.923,103.105 52.724,103.105 57.404,98.425 66.421,98.425 67.843,99.847 SW5.2 SW5.1 ; v1(43.307,57.912) 43.307,57.849 43.053,57.595 43.053,51.943 43.688,51.308 45.965,51.308 46.082,51.191 46.082,50.888 46.101,50.869 v1(46.101,50.165) ; v1(43.307,60.452) 47.043,60.452 v1(48.021,61.43) ; v1(44.704,42.397) 44.704,45.476 44.821,45.593 v1(46.101,45.593)
NetC30_1: C30.1 U8.6 | length 1.9
  Top Layer w0.2: C30.1@39.535,56.896 39.535,56.846 40.005,56.376 U8.6
NetC30_2: C30.2 U8.4 | length 1.9
  Top Layer w0.2: U8.4 37.465,56.376 37.935,56.846 C30.2@37.935,56.896
NetD1_2: D1.2 R8.1 | length 1.8
  Top Layer w0.2: D1.2@78.855,43.561 R8.1
NetD2_1: D2.1 Q1.3 R9.1 U4.2 | length 57.7
  Top Layer w0.2: R9.1 48.222,55.334 47.879,54.991 47.879,48.261 47.996,48.144 D2.1
  Top Layer w0.5: U4.2@49.53,85.447 54.253,85.447 57.023,82.677 57.023,54.737 55.1,52.814 Q1.3 52.179,52.814 51.562,52.197 51.562,50.122 49.784,48.344 D2.1
NetD3_1: D3.1 Q2.3 R12.1 U5.2 | length 25.9
  Top Layer w0.2: 80.518,55.372 80.607,55.461 R12.1
  Top Layer w0.5: Q2.3@77.674,52.959 77.674,52.914 77.774,52.814 79.23,52.814 79.566,53.149 ; U5.2 80.518,65.099 80.518,55.372 80.518,54.102 79.566,53.149 ; D3.1 81.661,48.206 81.011,48.856 80.176,48.856 79.883,49.149 79.883,52.832 79.566,53.149
NetD4_1: D4.1 Q4.3 R15.1 U6.2 | length 2.5
  Top Layer w0.5: 55.741,89.281 57.481,91.021 R15.1 ; 58.674,83.058 58.685,83.069
NetD5_1: D5.1 Q3.3 R16.1 U7.2 | length 38.5
  Top Layer w0.5: D5.1@65.532,83.069 65.532,53.848 66.566,52.814 Q3.3 ; R16.1 71.59,91.148 U7.2@73.238,92.796
NetD6_1: D6.1 R6.2 | length 1.2
  Top Layer w0.2: D6.1 37.578,67.437 R6.2
NetD7_2: D7.2 R9.2 | length 1.2
  Top Layer w0.2: R9.2 D7.2
NetD8_2: D8.2 R12.2 | length 1.4
  Top Layer w0.2: R12.2 D8.2
NetD9_2: D9.2 R15.2 | length 1.4
  Top Layer w0.53: R15.2 D9.2
NetD10_2: D10.2 R16.2 | length 1.2
  Top Layer w0.2: R16.2 D10.2
NetJP1_1: JP1.1 U8.12 | length 2.8
  Top Layer w0.3: JP1.1 37.266,49.966 37.266,50.811 37.441,50.986 U8.12
NetQ1_1: Q1.1 R10.2 R14.2 | length 3.1
  Top Layer w0.2: Q1.1 52.644,47.648 R10.2
NetQ2_1: Q2.1 R11.2 R20.2 | length 3.1
  Top Layer w0.2: Q2.1 76.924,50.414 R20.2 R11.2
NetQ3_1: Q3.1 R21.2 R23.2 | length 3.1
  Top Layer w0.2: Q3.1 68.881,50.414 R23.2 R21.2
NetQ4_1: Q4.1 R22.2 R24.2 | length 3.1
  Top Layer w0.2: Q4.1 60.837,50.414 R24.2 R22.2
NetR10_1: R10.1 U9.4 | length 18.2
  Top Layer w0.2: U9.4 42.347,43.236 42.672,43.561 53.213,43.561 54.394,44.742 R10.1
NetR11_1: R11.1 U9.7 | length 39.8
  Top Layer w0.2: U9.7 44.297,41.503 44.577,41.783 60.071,41.783 61.106,42.818 61.106,45.231 61.576,45.701 77.705,45.701 78.524,46.52 R11.1
NetR13_2: R13.2 TP1.1 U9.13 | length 12
  Top Layer w0.2: U9.13 42.347,45.029 42.672,44.704 R13.2 47.587,45.428 47.879,45.72 51.054,45.72 51.181,45.593 51.181,44.958 TP1.1
NetR25_1: R25.1 U1.5 | length 3.2
  Top Layer w0.2: R25.1 77.94,25.704 78.74,26.504 U1.5
NetR26_1: R26.1 U2.5 | length 3
  Top Layer w0.2: R26.1 67.399,25.323 68.199,26.123 U2.5
NetTP3_1: TP3.1 U8.8 | length 9.1
  Top Layer w0.2: U8.8 v1(41.656,53.086)
  Bottom Layer w0.2: v1(41.656,53.086) 41.656,58.166 42.291,58.801 44.196,58.801 TP3.1
RES: R17.2 TP2.1 U8.9 U9.9 | length 16.6
  Top Layer w0.2: U8.9 42.279,51.816 42.749,52.286 R17.2 42.799,51.035 43.053,50.781 v1(43.053,50.673) ; TP2.1 44.649,55.681 44.649,51.318 v1(45.37,50.597) 45.37,50.489 45.501,50.357 45.501,47.932 44.947,47.378 U9.9
  Bottom Layer w0.2: v1(43.053,50.673) 43.091,50.635 45.332,50.635 v1(45.37,50.597)
SCL: J1.4 J2.4 J3.1 J5.4 J6.4 R28.2 U8.3 U9.14 | length 118.8
  Top Layer w0.2: v1(36.103,69.215) 37.211,70.323 37.211,81.255 J3.1 ; U8.3 36.635,54.331 36.86,54.106 37.207,54.106 v1(37.338,53.975) ; v1(39.243,40.132) R28.2 38.744,40.357 38.744,40.649 40.132,42.037 41.148,42.037 41.697,42.586 U9.14 41.677,46.197 41.677,47.985 v1(41.656,48.006) ; J2.4 40.066,33.655 v1(41.275,33.655) ; v1(83.947,51.308) 86.347,51.308 J5.4 ; v1(85.09,60.071) 86.426,60.071 J6.4
  Bottom Layer w0.2: v1(36.103,69.215) 36.79,69.215 37.015,68.99 37.015,64.33 38.237,63.107 39.38,63.107 39.497,62.99 39.497,61.976 v1(38.989,61.468) 37.592,61.468 37.338,61.214 v1(37.338,53.975) 39.624,53.975 41.656,51.943 41.656,48.879 ; v1(39.243,40.132) 40.904,40.132 41.021,40.015 41.021,33.972 41.275,33.718 v1(41.275,33.655) ; v1(41.656,48.006) 41.656,48.879 ; v1(85.09,60.071) 83.947,58.928 v1(83.947,51.308) 82.931,51.308 80.664,49.041 42.506,49.041 42.344,48.879 41.656,48.879
SDA: J1.3 J2.3 J3.2 J5.3 J6.3 R27.2 U8.2 U9.15 | length 121.8
  Top Layer w0.2: v1(36.415,68.453) 36.415,68.561 38.735,70.881 38.735,83.439 38.075,84.099 J3.2@36.957,84.099 ; v1(38.735,62.484) 40.034,62.484 J1.3 ; v1(39.116,42.735) 40.576,42.735 41.047,43.206 U9.15 41.034,46.19 41.034,47.358 v1(41.021,47.371) ; J2.3@40.234,34.671 40.361,34.798 v1(41.656,34.798) ; v1(84.095,50.399) v1(84.095,50.399) 84.082,50.411 J5.3 ; v1(85.217,59.055) 85.225,59.047 J6.3
  Bottom Layer w0.2: v1(36.415,68.453) 36.415,63.28 37.211,62.484 ; v1(38.735,62.484) 37.211,62.484 ; v1(39.116,42.735) 41.602,42.735 41.719,42.618 41.719,34.861 v1(41.656,34.798) ; v1(85.217,59.055) 84.547,58.385 84.547,50.851 v1(84.095,50.399) 82.657,50.399 80.899,48.641 42.672,48.641 42.291,48.26 42.291,47.488 42.174,47.371 v1(41.021,47.371) 41.021,51.816 39.751,53.086 v1(37.211,53.086) 36.83,53.086 36.703,53.213 36.703,61.976 37.211,62.484
SW1: C9.2 R4.1 SW3.1 SW3.2 U9.12 | length 40.8
  Top Layer w0.2: U9.12 43.007,46.187 43.007,47.737 v1(43.016,47.747) ; C9.2 v1(54.356,37.148) R4.1